# Altium PCB layout.PcbDoc
Units mm, origin at the board's own origin, x right, y up, seen from the top; angles counter-clockwise.
Board outline 114 x 87 mm, 2 copper layers (Top Layer, Bottom Layer); 17 components, 16 nets, 73 pads, 0 vias.
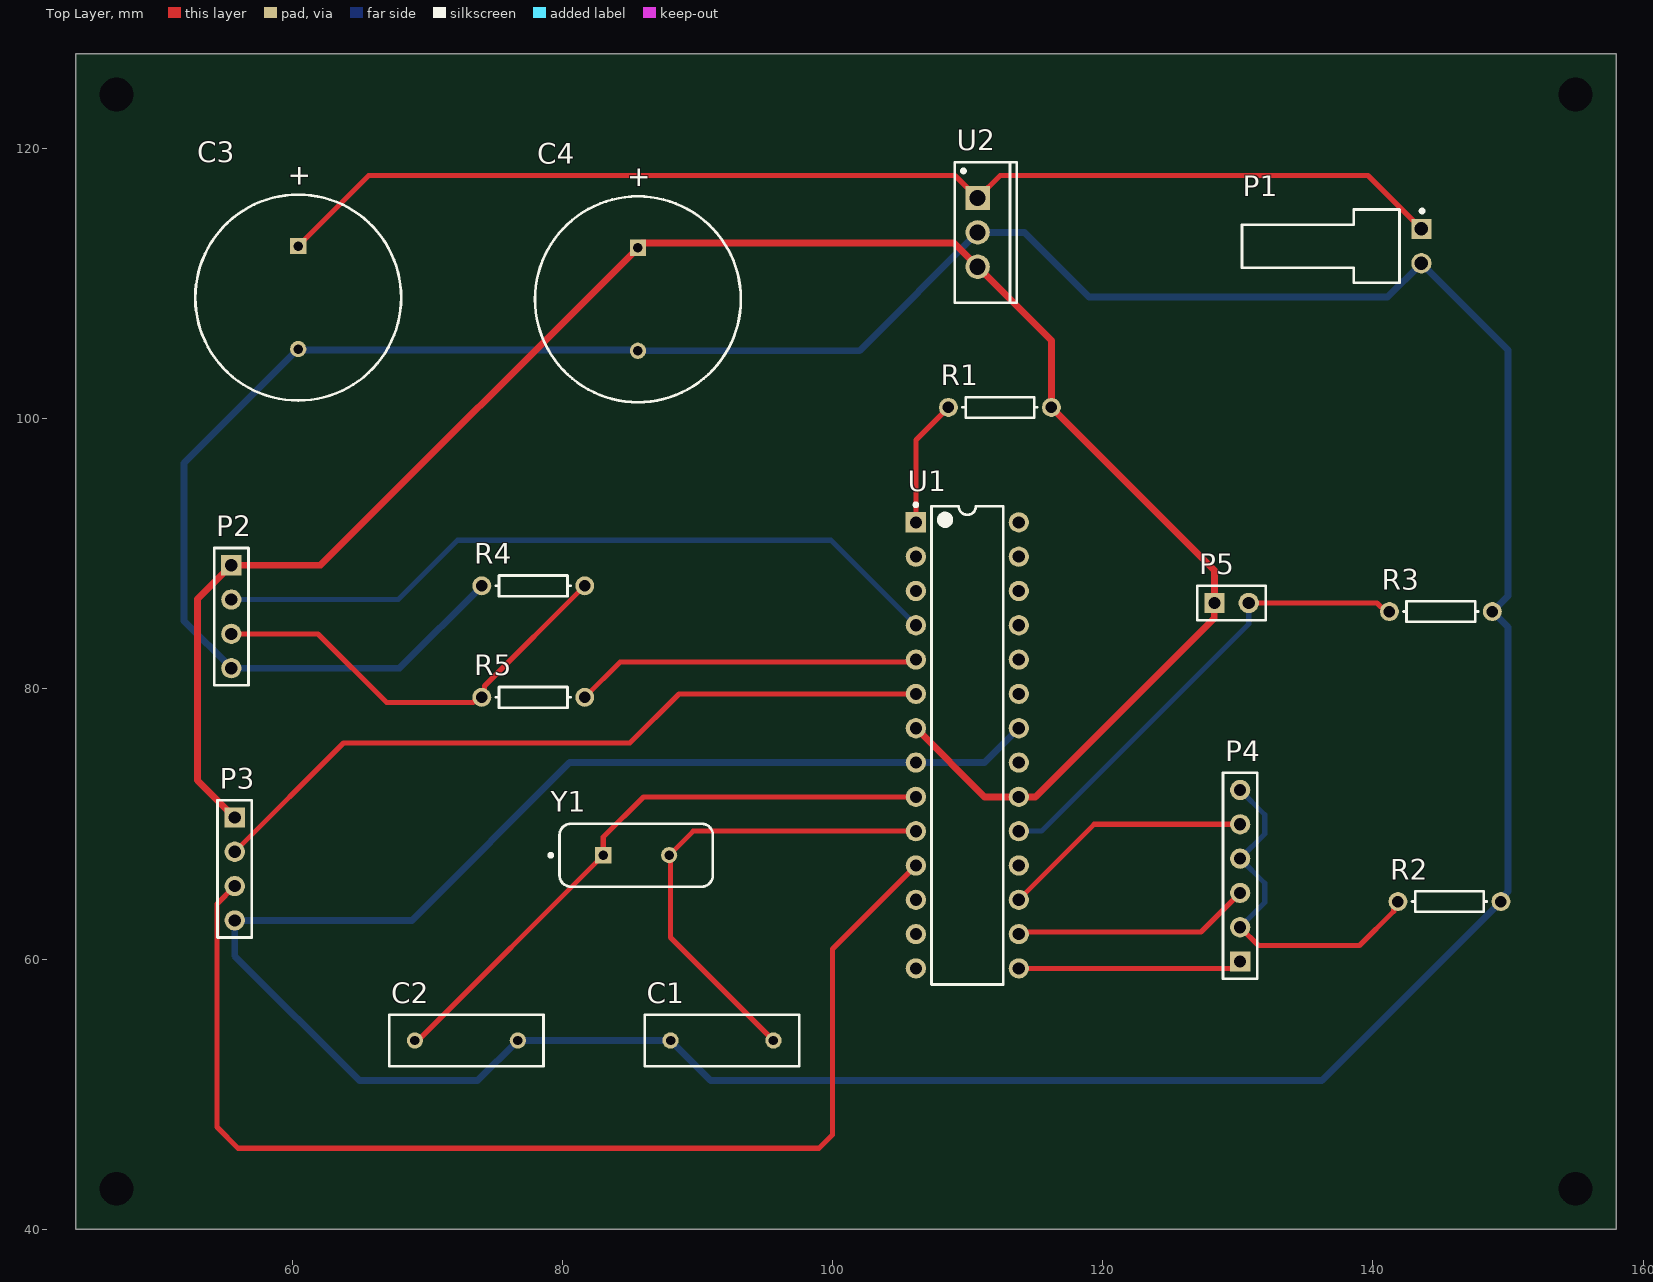
[diagram p0: Top Layer view]
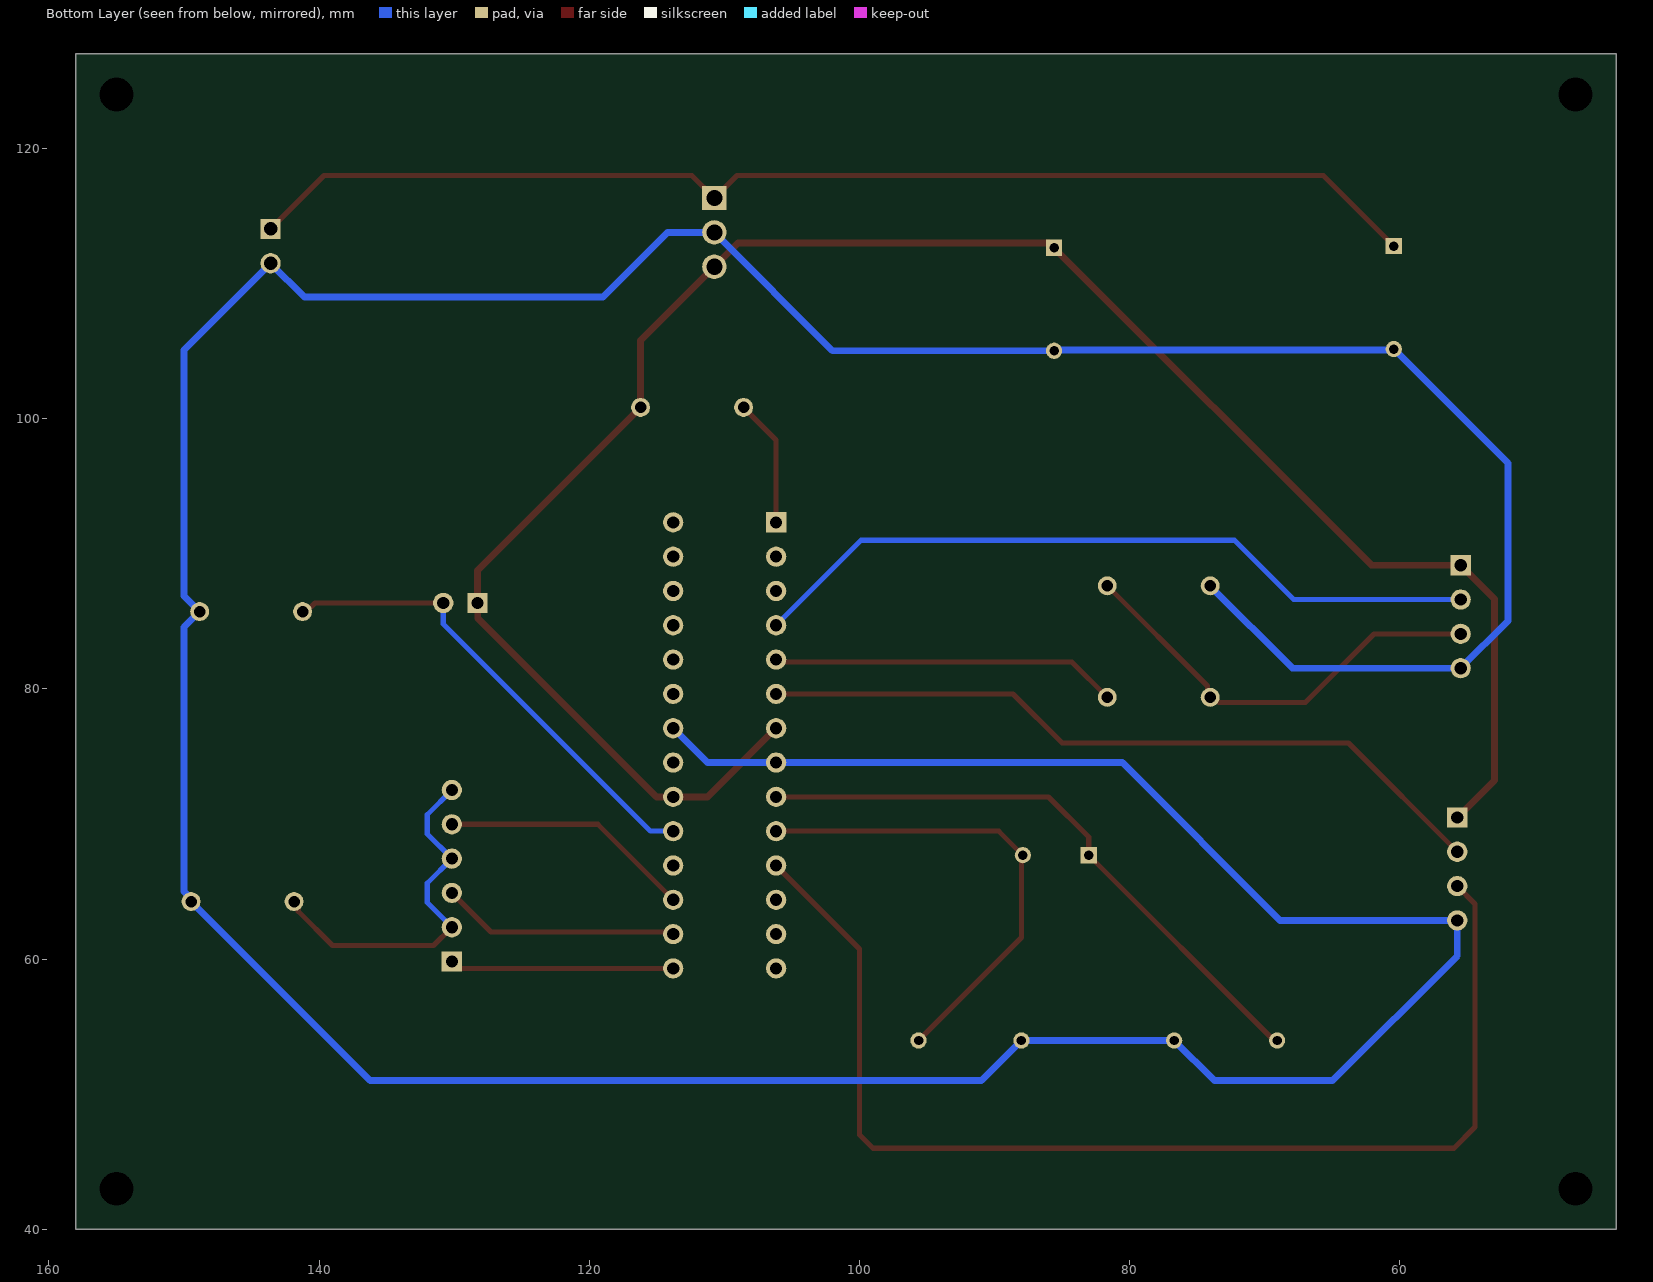
[diagram p1: Bottom Layer view, seen from below]

## Layer stack, top to bottom
Top Solder: solder mask 0.0102, Solder Resist, Dk 3.5
Top Layer: signal copper 0.0356
Dielectric 1: dielectric 0.32, FR-4, Dk 4.8
Bottom Layer: signal copper 0.0356
Bottom Solder: solder mask 0.0102, Solder Resist, Dk 3.5

## Board outline
44,40 158,40 158,127 44,127

## Design rules (kind name [scope] priority, off if disabled: settings)
Clearance [All] p1: gap=0.381 ignorepadtopadclearanceinfootprint=FALSE except(0.508: Arc-Hole Track-Hole SMDPad-Hole THPad-Hole Via-Hole Fill-Hole Poly-Hole Region-Hole Text-Hole)
PolygonConnect [All] p1: connectstyle=Relief reliefconductorwidth=0.254 reliefentries=4 polygonreliefangle="90 Angle" airgapwidth=0.254
RoomDefinition schematic [InComponentClass('schematic')] p1: confinementstyle=ConfineIn formatcopy=TRUE lockcomponents=FALSE outline 0,0 50.8,0 50.8,25.4 0,25.4
RoutingVias [All] p1: holewidth=0.711 width=1.27 viastyle="Through Hole" minholewidth=0.711 minwidth=1.27 maxholewidth=0.711 maxwidth=1.27
SilkToSolderMaskClearance [IsPad] p1: minsilkscreentomaskgap=0.229 clearancetoexposedcopper=TRUE
SolderMaskExpansion [All] p1: expansion=0.102 istentingtop=FALSE
UnRoutedNet [All] p1: checkbadconnections=TRUE
Width Width_1 [InNet('+5V') or InNet('GND')] p1: maxlimit=0.635 minlimit=0.381 preferedwidth=0.508
Width [All] p2: maxlimit=0.508 minlimit=0.254 preferedwidth=0.381
28 further rules are at their usual default settings.

## Components (designator, comment, footprint, x,y, rotation, side; value= is the part's Value field where it differs from the comment)
C1 "Cap" RAD-0.3 91.821,53.975 r180 top value=22pF
C2 "Cap" RAD-0.3 72.898,53.975 r0 top value=22pF
C3 "Cap Pol1" RB7.6-15 60.452,108.966 r90 top value=0.33uF
C4 "Cap Pol1" RB7.6-15 85.598,108.839 r90 top value=0.1uF
P1 "61900211021" 61900211021 136.144,112.776 r270 top
P2 "For Bluetooth" HDR1X4 55.499,89.154 r270 top
P3 "For HX711" HDR1X4 55.753,70.485 r270 top
P4 "For LEDs" HDR1X6 130.175,59.817 r90 top
P5 "Push Button" HDR1X2 128.27,86.36 r0 top
R1 "Res1" AXIAL-0.3 112.395,100.838 r180 top value=10kΩ
R2 "Res1" AXIAL-0.3 145.669,64.262 r0 top value=330Ω
R3 "Res1" AXIAL-0.3 145.034,85.725 r0 top value=10kΩ
R4 "Res1" AXIAL-0.3 77.851,87.63 r180 top value=470Ω
R5 "Res1" AXIAL-0.3 77.851,79.375 r180 top value=330Ω
U1 "ATmega328P-PU" 28P3 109.982,75.819 r0 top
U2 "L7805CP" TO220FP 110.744,113.792 r270 top
Y1 "16 MHz" FOX-FOXSLF160-20 85.471,67.691 r0 top

## Footprints (in the part's own frame and the unit in brackets; to place one, negate y for a bottom-side part, rotate by r counter-clockwise, add the part's x,y. Pads: shape width x height; smd on the part's side, far side on the other; paste and mask are expansions set on the pad)
28P3 [mm] "28-Pin Plastic Dual In-Line Package (PDIP)"
  rect 1.5x1.5 hole 0.9: 1(-3.81,16.51)
  round 1.5 hole 0.9: 2(-3.81,13.97) 3(-3.81,11.43) 4(-3.81,8.89) 5(-3.81,6.35) 6(-3.81,3.81) 7(-3.81,1.27) 8(-3.81,-1.27) 9(-3.81,-3.81) 10(-3.81,-6.35) 11(-3.81,-8.89) 12(-3.81,-11.43) 13(-3.81,-13.97) 14(-3.81,-16.51) 15(3.81,-16.51) 16(3.81,-13.97) 17(3.81,-11.43) 18(3.81,-8.89) 19(3.81,-6.35) 20(3.81,-3.81) 21(3.81,-1.27) 22(3.81,1.27) 23(3.81,3.81) 24(3.81,6.35) 25(3.81,8.89) 26(3.81,11.43) 27(3.81,13.97) 28(3.81,16.51)
  silkscreen extent -3.93,-17.7 2.65,17.93, body extent -3.6,-17.65 3.6,17.65, height 4.58
61900211021 [mm] "2.54mm Male Left Angled Header Bottom Locking, 2p"
  rect 1.5x1.5 hole 1: 1(-1.27,7.45)
  round 1.5 hole 1: 2(1.27,7.45)
  silkscreen extent -2.72,-5.82 2.71,7.63, body extent -2.54,-5.75 2.54,7.77, height 5.83
AXIAL-0.3 [mm] "Axial Device, Thru-Hole; 2 Leads; 0.3 in Pin Spacing"
  round 1.4 hole 0.85: 1(-3.81,0) 2(3.81,0)
  silkscreen extent -2.77,-0.76 2.77,0.76
FOX-FOXSLF160-20 [mm] "THD, 2-Leads, Body 11.35x4.65mm"
  rect 1.2x1.2 hole 0.7: 1(-2.44,0)
  round 1.2 hole 0.7: 2(2.44,0)
  silkscreen extent -6.45,-2.32 5.68,2.32, body extent -5.67,-2.32 5.68,2.33, height 3.6
HDR1X2 [mm] "Connector; Header; 2 Position"
  rect 1.5x1.5 hole 0.9: 1(0,0)
  round 1.5 hole 0.9: 2(2.54,0)
  silkscreen extent -1.27,-1.27 3.81,1.27
HDR1X4 [mm] "Connector; Header; 4 Position"
  rect 1.5x1.5 hole 0.9: 1(0,0)
  round 1.5 hole 0.9: 2(2.54,0) 3(5.08,0) 4(7.62,0)
  silkscreen extent -1.27,-1.27 8.89,1.27
HDR1X6 [mm] "Connector; Header; 6 Position"
  rect 1.5x1.5 hole 0.9: 1(0,0)
  round 1.5 hole 0.9: 2(2.54,0) 3(5.08,0) 4(7.62,0) 5(10.16,0) 6(12.7,0)
  silkscreen extent -1.27,-1.27 13.97,1.27
RAD-0.3 [mm] "Radial Cap, Thru-Hole; 2 Leads; 0.3 in Pin Spacing"
  round 1.2 hole 0.7: 1(-3.81,0) 2(3.81,0)
  silkscreen extent -5.71,-1.91 5.71,1.91
RB7.6-15 [mm] "Polarized Capacitor (Radial); 2 Leads"
  rect 1.2x1.2 hole 0.7: 1(3.81,0)
  round 1.2 hole 0.7: 2(-3.81,0)
  silkscreen extent -7.62,-7.62 7.62,7.62
TO220FP [mm] "TO, Thru-Hole, Vertical, Heatsink Mounted; 3 In-Line Leads; Pitch 2.54 mm"
  rect 1.8x1.8 hole 1.2: 1(-2.54,0)
  round 1.8 hole 1.2: 2(0,0) 3(2.54,0)
  silkscreen extent -5.2,-1.7 5.2,2.9, body extent -5.25,-1.75 5.25,2.95, height 20

## Part data
C1 C2: "Capacitor", LatestRevisionDate=17-Jul-2002, LatestRevisionNote="Re-released for DXP Platform.", PackageDescription="Radial Cap, Thru-Hole; 2 Leads; 0.3 in Pin Spacing", PackageReference=RAD-0.3, Published=8-Jun-2000, Publisher="Altium Limited"
C3 C4: "Polarized Capacitor (Radial)", LatestRevisionDate=17-Jul-2002, LatestRevisionNote="Re-released for DXP Platform.", PackageDescription="Polarized Capacitor (Radial); 2 Leads", PackageReference=RB7.6-15, Published=8-Jun-2000, Publisher="Altium Limited"
P1: library part CMP-1502-00592-1, "Male Bottom Locking Header WR-WTB, THT, Right Angled, pitch 2.54 mm, 1 x 2 position", Contact Resistance=20mOhm, Manufacturer="Wurth Elektronik", Operating Temperature=-40to105degC, Working Voltage=250VAC, Datasheet URL=https://katalog.we-online.de/em/datasheet/6190xx11021.pdf, Gender=Male, Manufacturer URL=http://www.we-online.de, Mounting Technology=THT, Orientation=RightAngled, Package Reference=61900211021, Packaging=Bag, Part Number=61900211021, Pitch=2.54mm, Position=1x2, Publisher=WurthElektronik
P2 P3: library part "Header 4", "Header, 4-Pin", LatestRevisionDate=17-Jul-2002, LatestRevisionNote="Re-released for DXP Platform.", Publisher="Altium Limited"
P4: library part "Header 6", "Header, 6-Pin", LatestRevisionDate=17-Jul-2002, LatestRevisionNote="Re-released for DXP Platform.", Publisher="Altium Limited"
P5: library part "Header 2", "Header, 2-Pin", LatestRevisionDate=17-Jul-2002, LatestRevisionNote="Re-released for DXP Platform.", Publisher="Altium Limited"
R1 R2 R3 R4 R5: "Resistor", LatestRevisionDate=17-Jul-2002, LatestRevisionNote="Re-released for DXP Platform.", PackageDescription="Axial Device, Thru-Hole; 2 Leads; 0.3 in Pin Spacing", PackageReference=AXIAL-0.3, Published=8-Jun-2000, Publisher="Altium Limited"
U1: library part CMP-0095-00013-2, "8-bit AVR Microcontroller, 32KB Flash, 1KB EEPROM, 2KB SRAM, 28-pin PDIP, Industrial Grade (-40°C to 85°C)", ComponentLink1Description="Manufacturer URL", ComponentLink1URL=http://www.atmel.com/, ComponentLink2Description="ATmega48A/48PA/88A/88PA/168A/168PA/328/328P Datasheet", ComponentLink2URL=http://www.atmel.com/dyn/resources/prod_documents/8271.pdf, ComponentLink3Description="ATmega48A/48PA/88A/88PA/168A/168PA/328/328P Summary", ComponentLink3URL=http://www.atmel.com/dyn/resources/prod_documents/8271S.pdf, DatasheetVersion="revD, May-2011", PackageDescription="28-lead (0.300\"/7.62mm Wide) Plastic Dual Inline Package (PDIP)", PackageReference=28P3, PackageVersion="revB, Sep-2001", RevisionNote="DatasheetVersion updated. URLs added."
U2: library part CMP-0244-00474-1, "Positive Voltage Regulator, 5V, 3-Pin TO-220FP", ComponentLink1Description="Manufacturer URL", ComponentLink1URL=http://www.st.com, ComponentLink2Description=Datasheet, ComponentLink2URL=http://www.st.com/internet/com/TECHNICAL_RESOURCES/TECHNICAL_LITERATURE/DATASHEET/CD00000444.pdf, DatasheetVersion=16/11/2011, PackageDescription="TO, Thru-Hole, Vertical, Heatsink Mounted; 3 In-Line Leads; Pitch 2.54 mm", PackageReference=TO220FP, PackageVersion=2011
Y1: library part CMP-1749-00003-1, "Resistance Weld Thru-Hole Crystal, 16 MHz, -20 to 70 degC, 2-Pin THD, RoHS, Bulk", Case\Package=Axial, Max Operating Temperature="155 degC", Min Operating Temperature="-55 degC", Package Quantity=200, Power Rating="250 mW", Resistance="221 kohm", Tolerance=1%, Voltage Rating="250 V", ComponentLink1Description="Manufacturer URL", ComponentLink1URL=http://www.foxonline.com/, ComponentLink2Description=Datasheet, ComponentLink2URL=http://www.foxonline.com/pdfs/hc49slf.pdf, DatasheetVersion=Mar-15, Length="0.248 inch", Mount="Through Hole", PackageDescription="2-Pin Through Hole Device, Body 11.35 x 4.65 mm", PackageReference=FOXSLF160-20, Packaging=Bulk, RoHSCompliant=true

## Free pads (board coordinates)
  round 0 hole 2.5 unplated: 2(155,124) 3(47,124) 4(47,43) 5(155,43)

## Nets (pads, with @x,y where several pads share a name; then routed paths per layer and width w, separated by ;. In a path a pad name is that pad's centre, name@x,y a point inside that pad or via, vN(x,y) a via of type N, cw(c..) or ccw(c..) an arc to the next point about the centre after c; other vN are vias at no path point)
+5V: C4.1 P2.1 P3.1 P5.1 R1.1 U1.7 U1.20 U2.3 | length 149.6
  Top Layer w0.508: P3.1 53,73.238 53,86.655 P2.1 62.103,89.154 C4.1 85.949,113 108.996,113 U2.3 116.205,105.791 R1.1 128.27,88.773 P5.1 128.262,86.352 128.262,85.262 115.009,72.009 111.252,72.009 U1.7
GND: C1.2 C2.2 C3.2 C4.2 P1.2 P2.4 P3.4 R2.2 R3.2 R4.2 U1.8 U1.22 U2.2 | length 362.6
  Bottom Layer w0.508: R4.2 67.945,81.534 P2.4 52,85.033 52,96.704 C3.2 60.515,105.093 85.534,105.093 C4.2 101.981,105.029 U2.2 114.208,113.792 119,109 141.088,109 P1.2 150,105.1 150,86.881 R3.2 150,84.569 150,64.995 149.479,64.474 R2.2 136.217,51 90.986,51 C1.2 C2.2 73.733,51 65,51 55.753,60.247 P3.4 68.865,62.865 80.549,74.549 U1.8 111.252,74.549 U1.22
NetC1_1: C1.1 U1.10 Y1.2 | length 35.9
  Top Layer w0.381: C1.1 88,61.606 88,67.602 Y1.2 89.689,69.469 U1.10
NetC2_1: C2.1 U1.9 Y1.1 | length 45.3
  Top Layer w0.381: C2.1 69.245,54.132 69.472,54.132 Y1.1 83.031,69.031 86.009,72.009 U1.9
NetC3_1: C3.1 P1.1 U2.1 | length 88.3
  Top Layer w0.381: C3.1 65.676,118 109.076,118 U2.1 112.412,118 139.64,118 P1.1
NetP2_2: P2.2 U1.4 | length 55.1
  Bottom Layer w0.381: P2.2 67.851,86.614 72.237,91 99.881,91 U1.4
NetP2_3: P2.3 R4.1 R5.2 | length 32.2
  Top Layer w0.381: P2.3 61.926,84.074 67,79 73.39,79 73.765,79.375 R5.2 74.236,79.57 74.236,80.205 R4.1
NetP3_2: P3.2 U1.6 | length 55.3
  Top Layer w0.381: P3.2 63.808,76 85,76 88.629,79.629 U1.6
NetP3_3: P3.3 U1.11 | length 87.5
  Top Layer w0.381: P3.3 54.431,64.083 54.431,47.569 56,46 99,46 100,47 100,60.757 U1.11
NetP4_1: P4.1 U1.15 | length 16.6
  Top Layer w0.381: U1.15 129.667,59.309 P4.1
NetP4_2: P4.2 P4.4 P4.6 R2.1 | length 27
  Top Layer w0.381: P4.2 131.532,61 139,61 141.542,63.542 141.542,63.67 141.859,63.986 R2.1
  Bottom Layer w0.381: P4.2 132,64.182 132,65.612 P4.4 132,69.262 132,70.692 P4.6
NetP4_3: P4.3 U1.16 | length 17.6
  Top Layer w0.381: U1.16 113.943,62 127.278,62 P4.3
NetP4_5: P4.5 U1.17 | length 18.7
  Top Layer w0.381: U1.17 119.38,69.977 P4.5
NetP5_2: P5.2 R3.1 U1.19 | length 35.6
  Top Layer w0.381: P5.2 140.313,86.36 140.948,85.725 R3.1
  Bottom Layer w0.381: U1.19 115.469,69.469 130.81,84.81 P5.2
NetR1_2: R1.2 U1.1 | length 9.5
  Top Layer w0.381: U1.1 106.172,98.425 R1.2
NetR5_1: R5.1 U1.5 | length 25.7
  Top Layer w0.381: R5.1 84.286,82 106.003,82 U1.5
pads on no net: U1.2 U1.3 U1.12 U1.13 U1.14 U1.18 U1.21 U1.23 U1.24 U1.25 U1.26 U1.27 U1.28

## Text inside footprints (layer, text, board x,y; h text height)
C3: Top Overlay "+" at 61.189,117.098 h1.5 r90
C4: Top Overlay "+" at 86.335,116.971 h1.5 r90